# Altium PCB SART-Motor-DriverV1.0.PcbDoc
Units mm, origin at the board's own origin, x right, y up, seen from the top; angles counter-clockwise.
Board outline 70 x 50 mm, 4 copper layers (Top Layer, Layer 1, Layer 2, Bottom Layer), stack 1.566 mm thick; 77 components, 66 nets, 281 pads, 65 vias.
Unrouted connection lines stored in the file: 77.
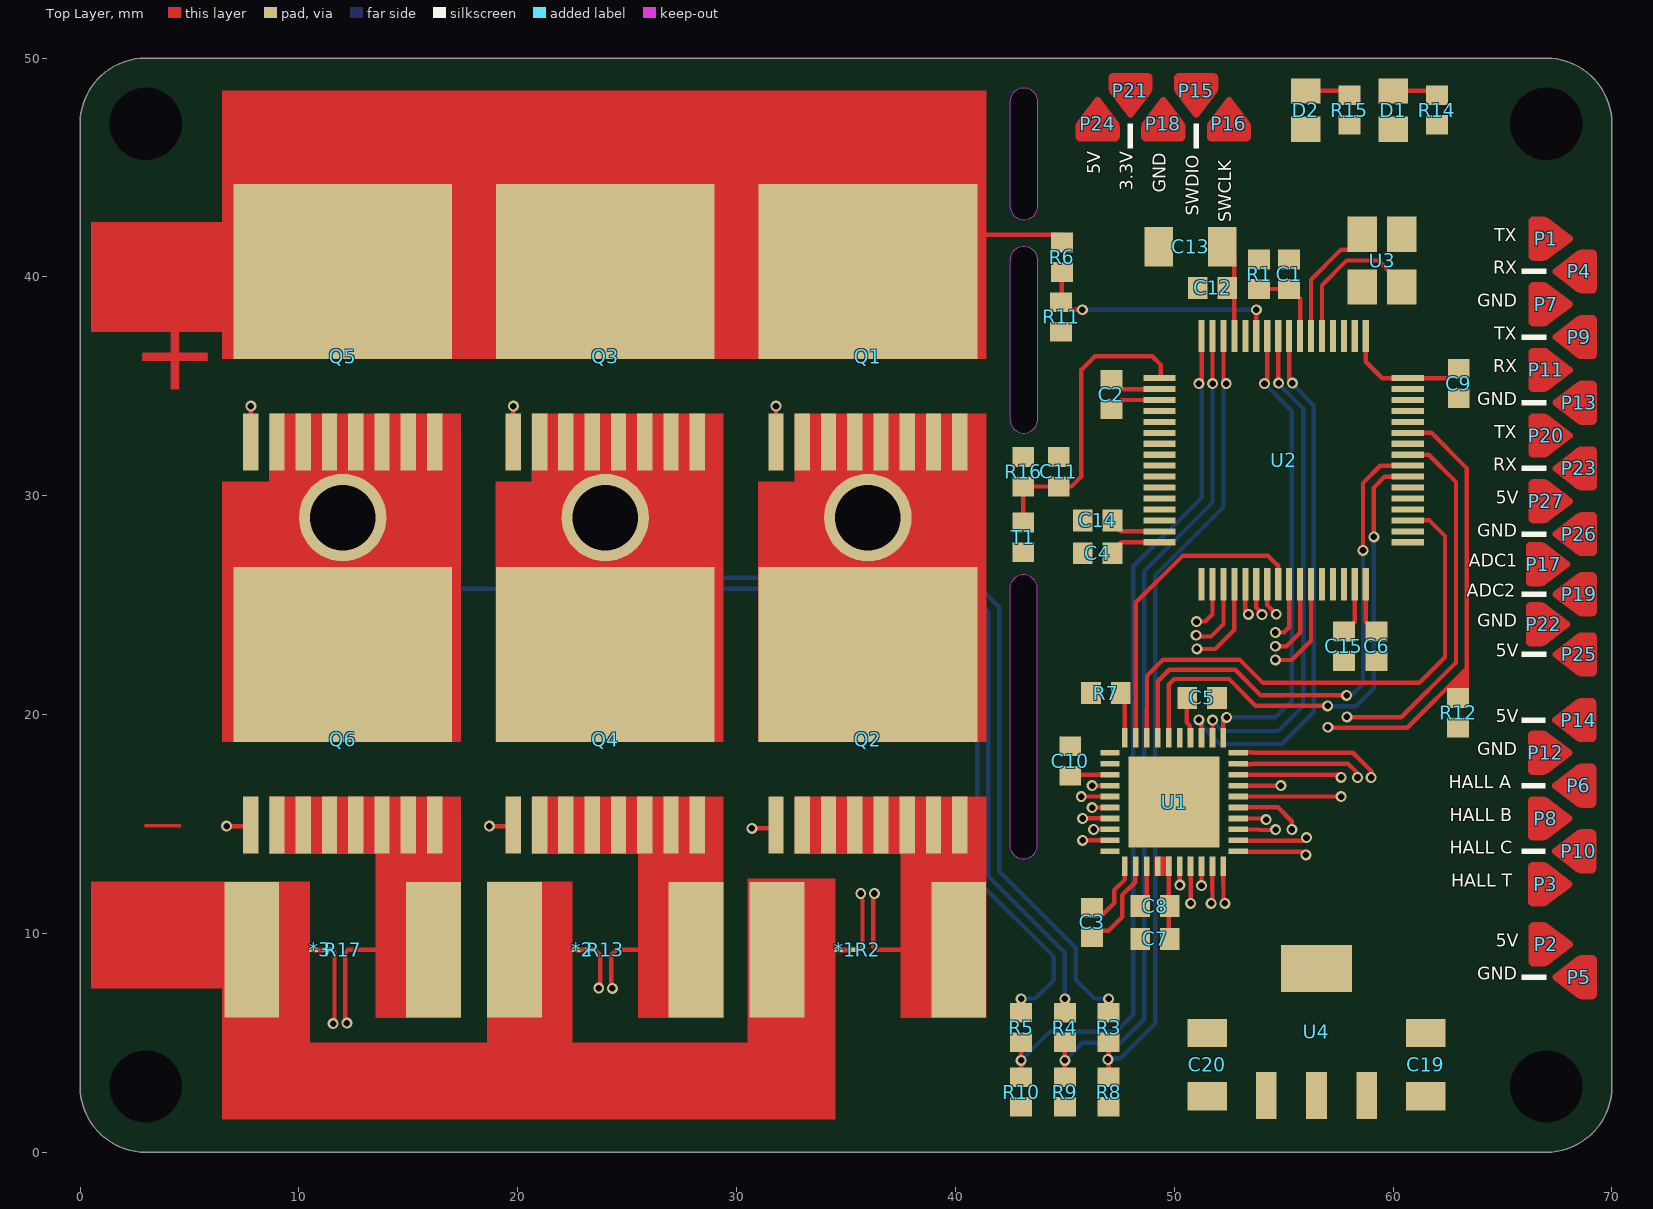
[diagram p0: Top Layer view]
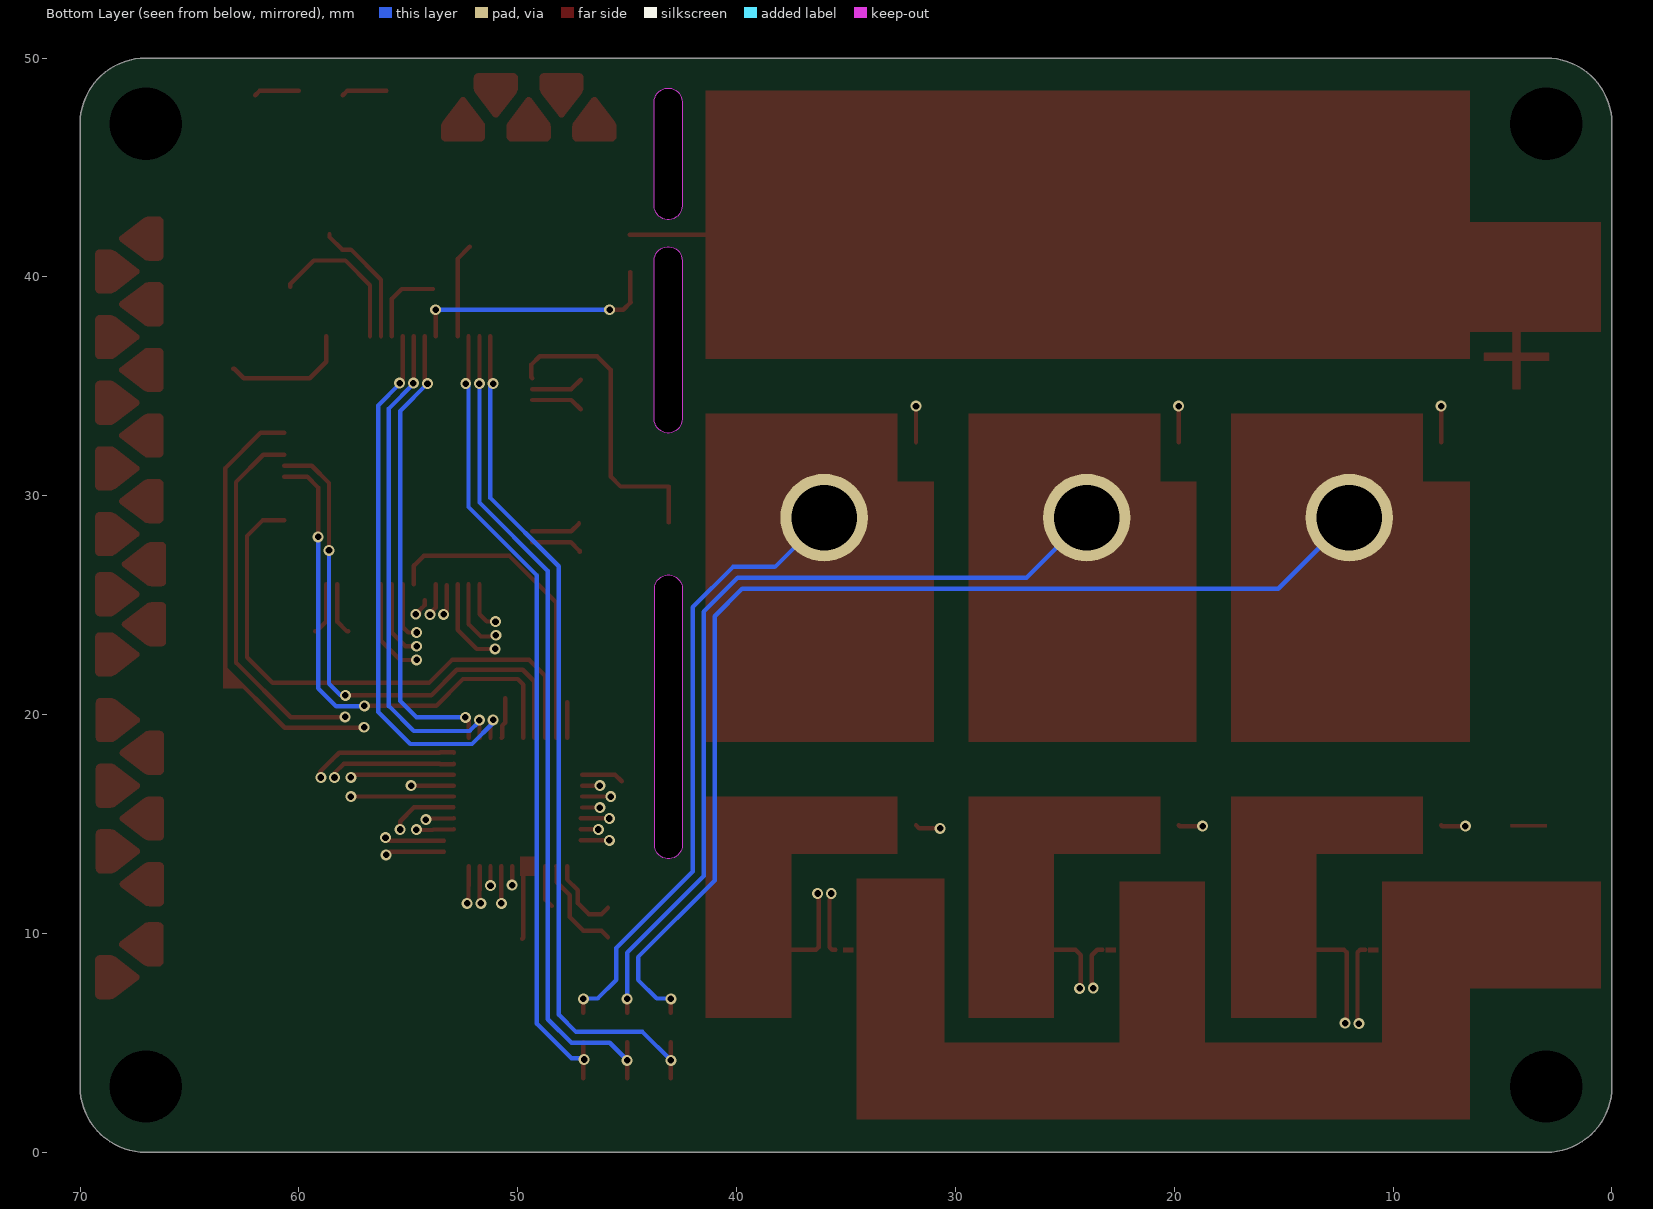
[diagram p1: Bottom Layer view, seen from below]
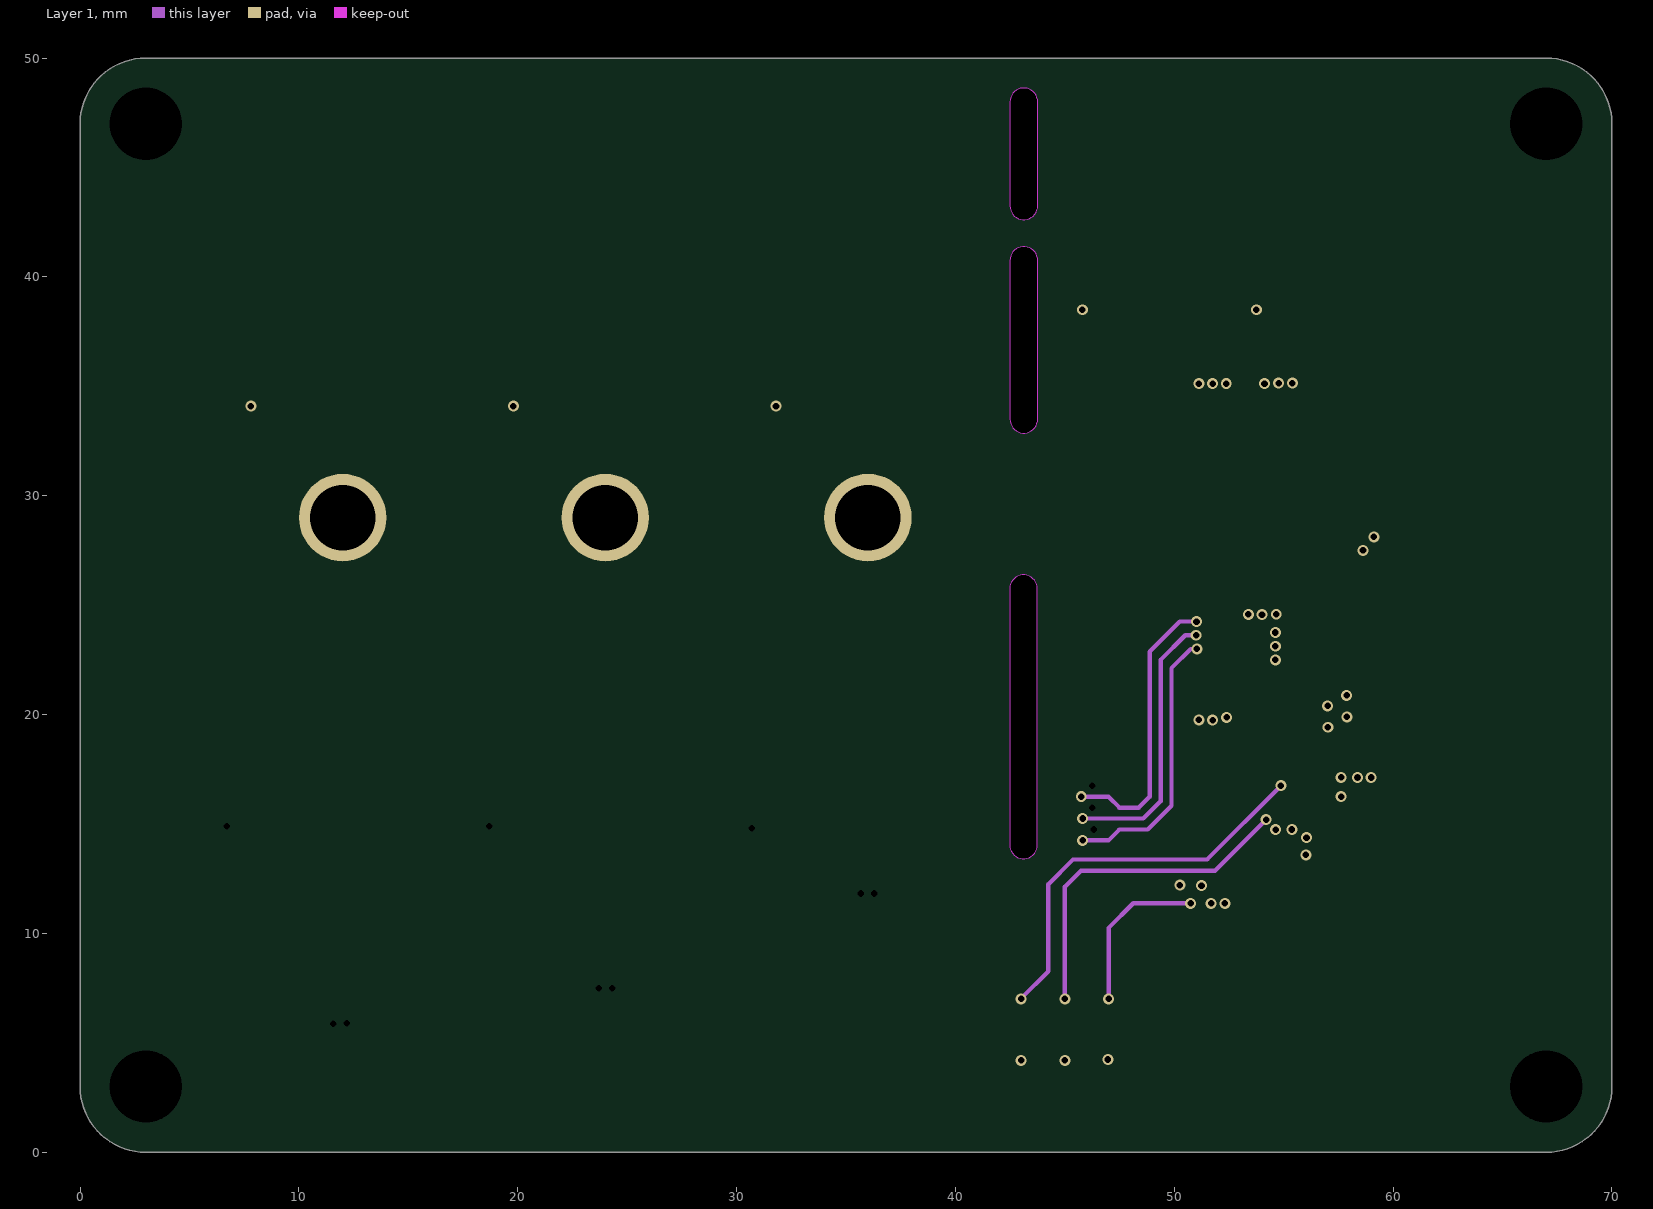
[diagram p2: Layer 1]
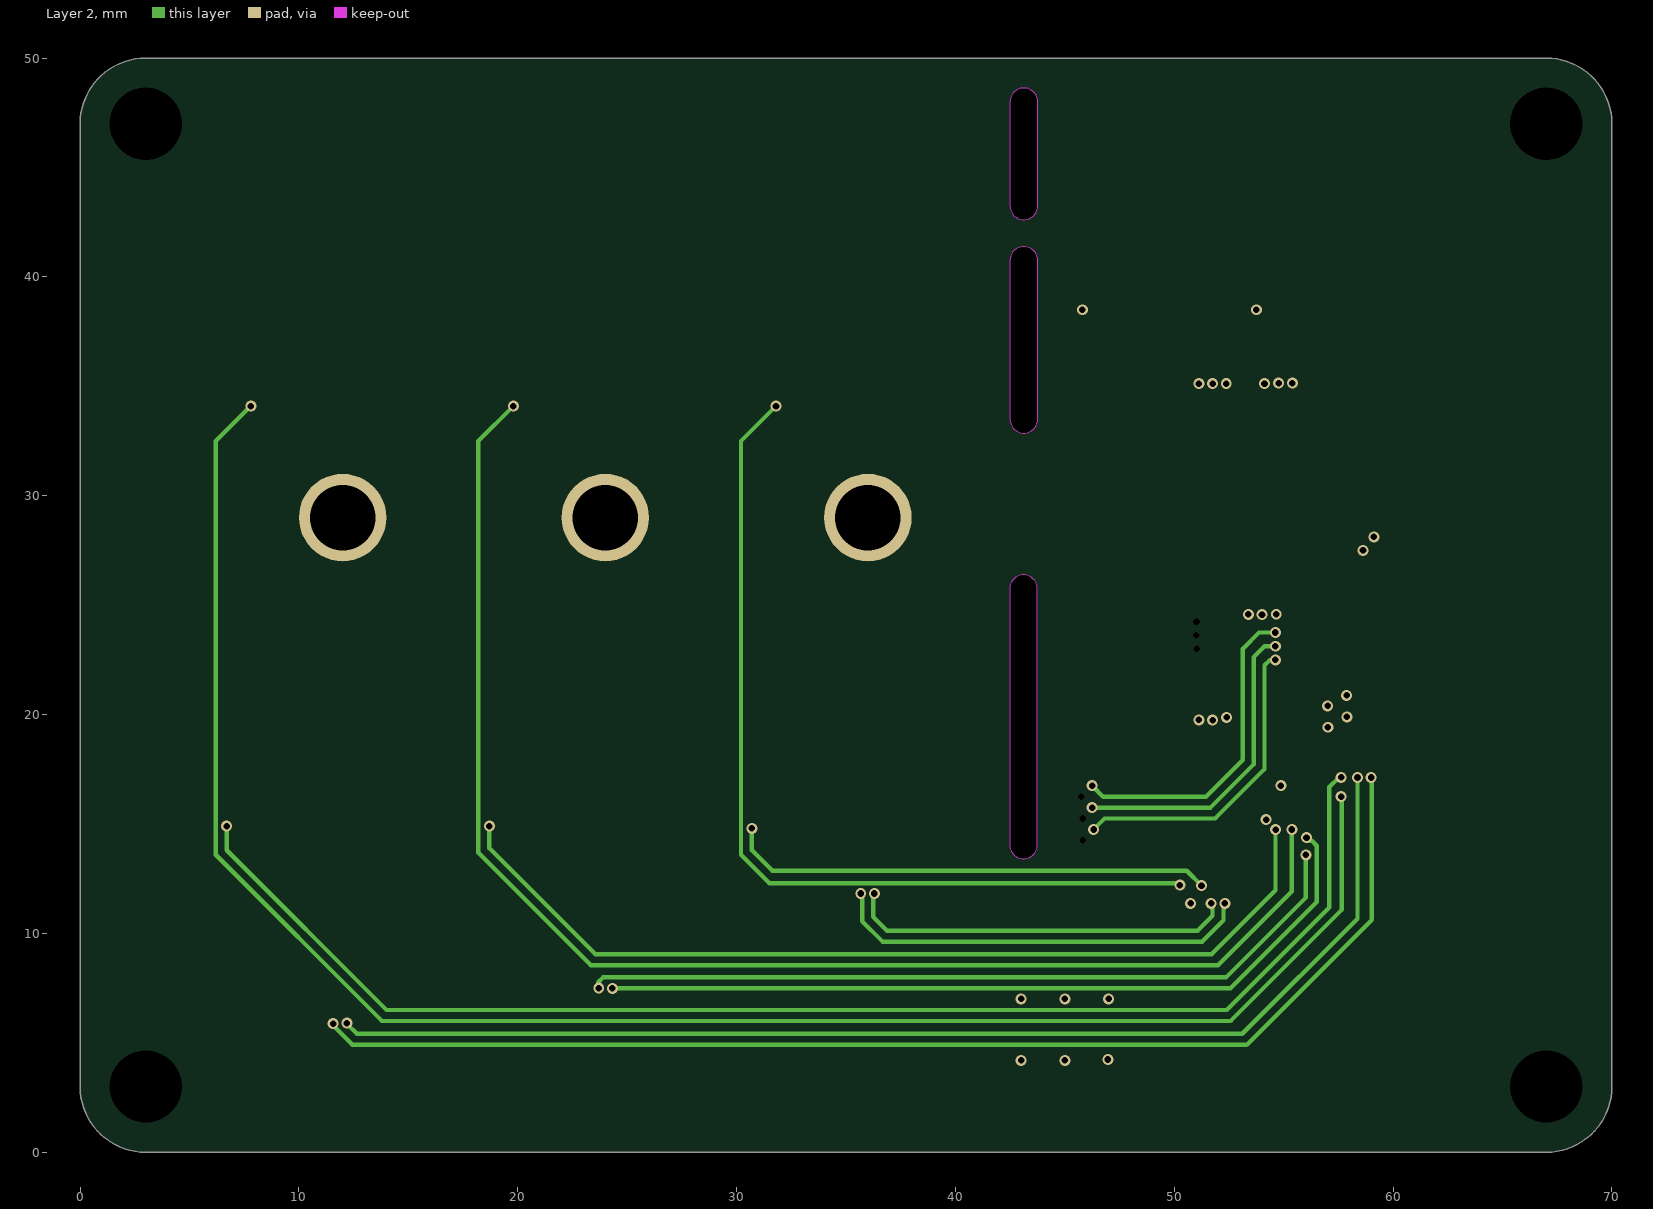
[diagram p3: Layer 2]
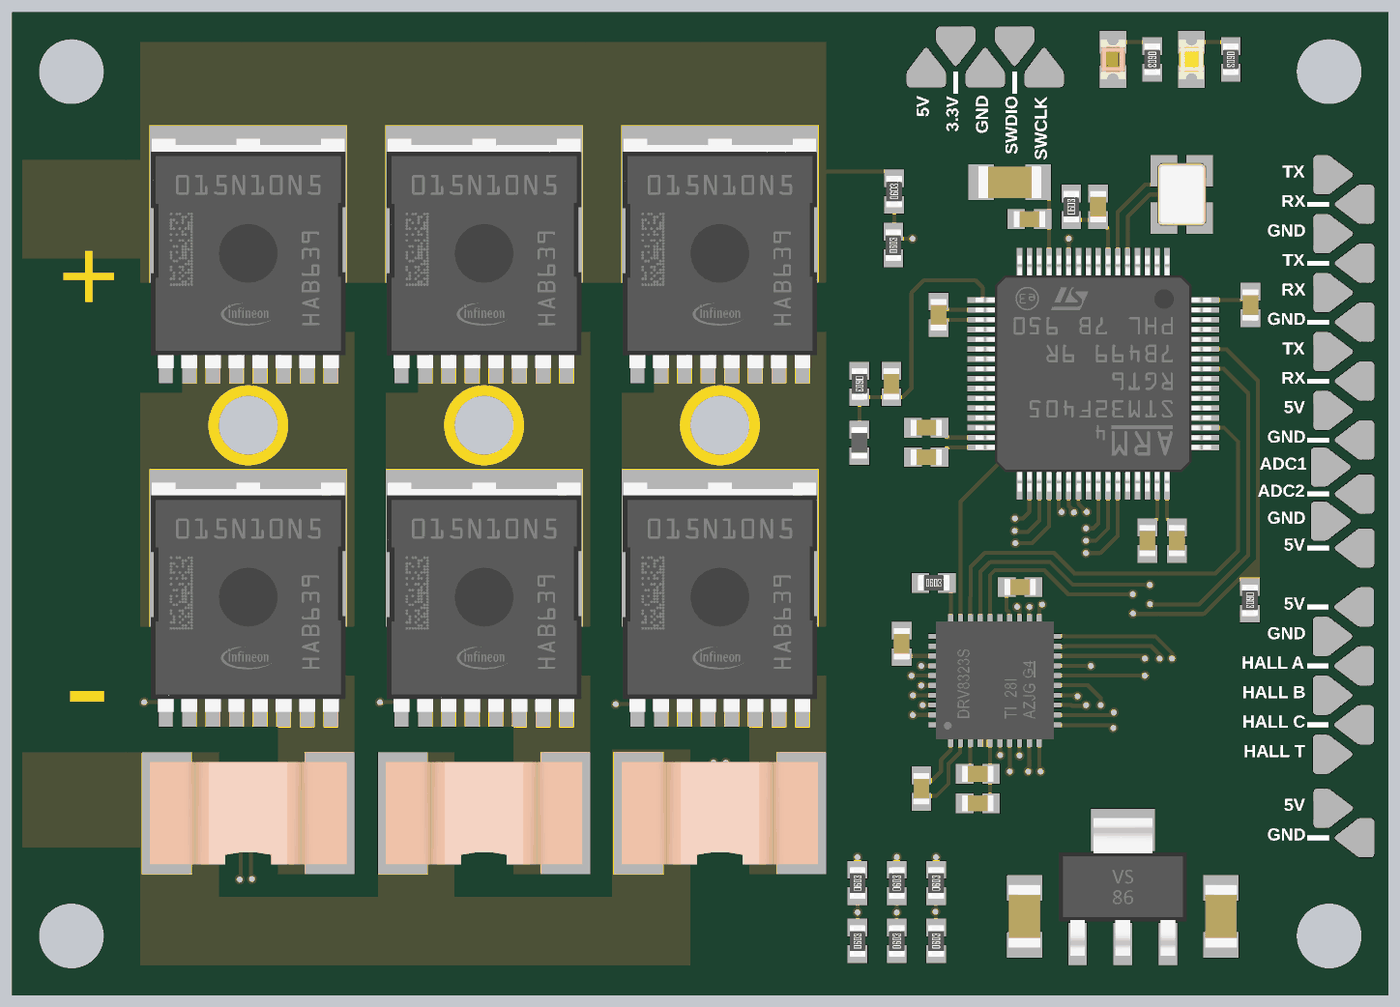
[diagram p4: 3D render of the assembled board from above, using the file's embedded part models]

## Layer stack, top to bottom
Top Solder: solder mask 0.0305, Solder Resist, Dk 3.5
Top Layer: signal copper 0.0351
Dielectric 2: prepreg 0.2029, PP-006, Dk 4.1
Layer 1: signal copper 0.03
Dielectric 1: dielectric 1.03, FR-4, Dk 4.8
Layer 2: signal copper 0.03
Dielectric 3: prepreg 0.2029, PP-006, Dk 4.1
Bottom Layer: signal copper 0.0351
Bottom Solder: solder mask 0.0305, Solder Resist, Dk 3.5

## Board outline
3,0 67,0 ccw(c67,3) 70,3 70,47 ccw(c67,47) 67,50 3,50 ccw(c3,47) 0,47 0,3 ccw(c3,3)
cut-out: 42.479,14.05 ccw(c43.115,14.05) 43.75,14.05 43.75,25.75 ccw(c43.115,25.75) 42.479,25.75
cut-out: 42.49,43.25 ccw(c43.125,43.25) 43.76,43.25 43.76,48 ccw(c43.125,48) 42.49,48
cut-out: 42.49,33.5 ccw(c43.125,33.5) 43.76,33.5 43.76,40.75 ccw(c43.125,40.75) 42.49,40.75

## Design rules (kind name [scope] priority, off if disabled: settings)
BoardOutlineClearance [All] p1: gap=0.2 ignorepadtopadclearanceinfootprint=FALSE
Clearance [All] p1: gap=0.127 ignorepadtopadclearanceinfootprint=FALSE
ComponentClearance [All] p1 off: gap=0.254 collisioncheckmode=3 verticalgap=0 showdistances=FALSE checkcomponentboundary=TRUE
DiffPairsRouting [All] p1: maxlimit=0.3 minlimit=0.3 mostfreqgap=0.3 toplayer_minwidth=0.2 toplayer_maxwidth=0.2 toplayer_prefwidth=0.2 midlayer1_minwidth=0.2 midlayer1_maxwidth=0.2 midlayer1_prefwidth=0.2 midlayer2_minwidth=0.2 midlayer2_maxwidth=0.2 midlayer2_prefwidth=0.2 bottomlayer_minwidth=0.2 bottomlayer_maxwidth=0.2 bottomlayer_prefwidth=0.2 maxuncoupledlength=12.7
PolygonConnect [All] p1: connectstyle=Relief reliefconductorwidth=0.254 reliefentries=4 polygonreliefangle="90 Angle" airgapwidth=0.254
RoutingVias [All] p1: holewidth=0.3 width=0.5 viastyle="Through Hole" minholewidth=0.3 minwidth=0.5 maxholewidth=0.711 maxwidth=1.27
ShortCircuit [InComponent('*1')or InComponent('*2') or InComponent('*3') vs InComponent('*1')or InComponent('*2') or InComponent('*3')] p1: allowed=TRUE
SilkToSilkClearance [All] p1 off: silktosilkclearance=0.254
SolderMaskExpansion [All] p1: expansion=0.035 istentingtop=FALSE
Width [All] p1: maxlimit=2 minlimit=0.127 preferedwidth=0.2
26 further rules are at their usual default settings.

## Classes and differential pairs
net class ShuntNet: SA_N SB_N SC_N
differential pair SC: +SC_P -SC_N
differential pair SB: +SB_P -SB_N
differential pair SA: +SA_P -SA_N

## Components (designator, comment, footprint, x,y, rotation, side; value= is the part's Value field where it differs from the comment)
*1 "NetTie" NETTİE 35.125,9.25 r0 top
*2 "NetTie" NETTİE 23.125,9.25 r0 top
*3 "NetTie" NETTİE 11.125,9.25 r0 top
C1 "0603, 0.1uF" "CAP 0603_1608" 55.25,40.125 r90 top
C2 "0603, 1uF" "CAP 0603_1608" 47.125,34.625 r90 top
C3 "0603, 0.047uF" "CAP 0603_1608" 46.25,10.5 r90 top
C4 "0603, 1uF" "CAP 0603_1608" 46.5,27.375 r180 top
C5 "0603, 1uF" "CAP 0603_1608" 51.275,20.764 r0 top
C6 "0603, 1uF" "CAP 0603_1608" 59.25,23.125 r270 top
C7 "0603, 0.1uF" "CAP 0603_1608" 49.125,9.75 r180 top
C8 "0603, 1uF" "CAP 0603_1608" 49.125,11.25 r180 top
C9 "0603, 1uF" "CAP 0603_1608" 63,35.125 r270 top
C10 "0603, 1uF" "CAP 0603_1608" 45.25,17.875 r90 top
C11 "0603, 0.1uF" "CAP 0603_1608" 44.724,31.1 r90 top
C12 "0603, 0.1uF" "CAP 0603_1608" 51.75,39.5 r180 top
C13 "1206, 2.2uF" "CAP 1206_3216" 50.75,41.375 r0 top
C14 "0603, 1uF" "CAP 0603_1608" 46.5,28.875 r0 top
C15 "0603, 1uF" "CAP 0603_1608" 57.75,23.125 r90 top
C19 "1206, 2.2uF" "CAP 1206_3216" 61.5,4 r90 top
C20 "1206, 2.2uF" "CAP 1206_3216" 51.5,4 r90 top
D1 "0805 LED Yellow" "LED 0805_2012 YELLOW" 60,47.625 r90 top
D2 "0805 LED Red" "LED 0805_2012 RED" 56,47.625 r90 top
P1 "Pad1" PAD 67,41.75 r270 top
P2 "Pad1" PAD 67,9.5 r270 top
P3 "Pad1" PAD 66.975,12.25 r270 top
P4 "Pad0" PAD 68.5,40.25 r90 top
P5 "Pad0" PAD 68.5,8 r90 top
P6 "Pad0" PAD 68.475,16.75 r90 top
P7 "Pad1" PAD 67,38.75 r270 top
P8 "Pad1" PAD 66.975,15.25 r270 top
P9 "Pad1" PAD 68.5,37.25 r90 top
P10 "Pad0" PAD 68.475,13.75 r90 top
P11 "Pad0" PAD 67,35.75 r270 top
P12 "Pad1" PAD 66.975,18.25 r270 top
P13 "Pad1" PAD 68.5,34.25 r90 top
P14 "Pad0" PAD 68.475,19.75 r90 top
P15 "Pad1" PAD 51,48.5 r180 top
P16 "Pad0" PAD 52.5,47 r0 top
P17 "Pad0" PAD 66.875,26.875 r270 top
P18 "Pad1" PAD 49.5,47 r0 top
P19 "Pad1" PAD 68.5,25.5 r90 top
P20 "Pad1" PAD 67,32.75 r270 top
P21 "Pad0" PAD 48,48.5 r180 top
P22 "Pad0" PAD 66.875,24.125 r270 top
P23 "Pad0" PAD 68.5,31.25 r90 top
P24 "Pad1" PAD 46.5,47 r0 top
P25 "Pad1" PAD 68.5,22.75 r90 top
P26 "Pad1" PAD 68.5,28.25 r90 top
P27 "Pad1" PAD 67,29.75 r270 top
Q1 "IPT015N10N5" IPT015N10N5 36,37.75 r0 top
Q2 "IPT015N10N5" IPT015N10N5 36,20.25 r0 top
Q3 "IPT015N10N5" IPT015N10N5 24,37.75 r0 top
Q4 "IPT015N10N5" IPT015N10N5 24,20.25 r0 top
Q5 "IPT015N10N5" IPT015N10N5 12,37.75 r0 top
Q6 "IPT015N10N5" IPT015N10N5 12,20.25 r0 top
R1 "0603, 10K" "RES 0603_1608" 53.875,40.125 r90 top
R2 "WSLP3921L2000FEA" WSLP3921L2000FEA 36,9.25 r270 top locked
R3 "0603, 41K" "RES 0603_1608" 47,5.7 r90 top
R4 "0603, 41K" "RES 0603_1608" 45,5.7 r90 top
R5 "0603, 41K" "RES 0603_1608" 43,5.7 r90 top
R6 "0603, 41K" "RES 0603_1608" 44.866,40.899 r90 top
R7 "0603, 10K" "RES 0603_1608" 46.875,20.978 r0 top
R8 "0603, 2.2K" "RES 0603_1608" 47,2.75 r90 top
R9 "0603, 2.2K" "RES 0603_1608" 45,2.75 r90 top
R10 "0603, 2.2K" "RES 0603_1608" 43,2.75 r90 top
R11 "0603, 2.2K" "RES 0603_1608" 44.828,38.174 r90 top
R12 "0603, 10K" "RES 0603_1608" 62.974,20.086 r270 top
R13 "WSLP3921L2000FEA" WSLP3921L2000FEA 24,9.25 r270 top
R14 "0603, 2.2K" "RES 0603_1608" 62,47.625 r270 top
R15 "0603, 2.2K" "RES 0603_1608" 58,47.625 r270 top
R16 "0603, 10K" "RES 0603_1608" 43.099,31.1 r270 top
R17 "WSLP3921L2000FEA" WSLP3921L2000FEA 12,9.25 r270 top
T1 "0603, 10K" "RES 0603_1608" 43.099,28.1 r270 top
U1 "DRV8323SRTAT" DRV8323SRTAT 49.995,16.005 r90 top
U2 "STM32F405RGT6" STM32F405RGT6 55,31.625 r270 top
U3 "FL0800011Q" FL0800011Q 59.5,40.75 r270 top
U4 "TLV1117-33IDCYR" TLV1117-33IDCYR 56.5,5.5 r90 top

## Footprints (in the part's own frame and the unit in brackets; to place one, negate y for a bottom-side part, rotate by r counter-clockwise, add the part's x,y. Pads: shape width x height; smd on the part's side, far side on the other; paste and mask are expansions set on the pad)
"CAP 0603_1608" [mm] "Chip Capacitor, 2-Leads, Body 1.60x0.80mm, IPC Medium Density"
  rect 0.9x1 smd: 1(-0.675,0) 2(0.675,0)
  body extent -0.8,-0.41 0.8,0.41, height 0.82
"CAP 1206_3216" [mm] "Chip Capacitor, 2-Leads, Body 3.25x1.60mm, IPC Medium Density"
  rect 1.3x1.8 smd: 1(-1.45,0) 2(1.45,0)
  body extent -1.6,-0.81 1.6,0.81, height 1.62
DRV8323SRTAT [mm]
  rect 0.88x0.26 smd: 1(-2.935,2.25) 2(-2.935,1.75) 3(-2.935,1.25) 4(-2.935,0.75) 5(-2.935,0.25) 6(-2.935,-0.25) 7(-2.935,-0.75) 8(-2.935,-1.25) 9(-2.935,-1.75) 10(-2.935,-2.25) 21(2.935,-2.25) 22(2.935,-1.75) 23(2.935,-1.25) 24(2.935,-0.75) 25(2.935,-0.25) 26(2.935,0.25) 27(2.935,0.75) 28(2.935,1.25) 29(2.935,1.75) 30(2.935,2.25)
  rect 0.26x0.88 smd: 11(-2.25,-2.935) 12(-1.75,-2.935) 13(-1.25,-2.935) 14(-0.75,-2.935) 15(-0.25,-2.935) 16(0.25,-2.935) 17(0.75,-2.935) 18(1.25,-2.935) 19(1.75,-2.935) 20(2.25,-2.935) 31(2.25,2.935) 32(1.75,2.935) 33(1.25,2.935) 34(0.75,2.935) 35(0.25,2.935) 36(-0.25,2.935) 37(-0.75,2.935) 38(-1.25,2.935) 39(-1.75,2.935) 40(-2.25,2.935)
  rect 4.15x4.15 smd: 41(0,0)
  body extent -3,-3 3,3, height 0.81
FL0800011Q [mm]
  rect 1.6x1.35 smd: 1(-1.2,-0.9) 3(1.2,0.9) 4(-1.2,0.9) 4(1.2,-0.9)
  body extent -1.6,-1.25 1.6,1.25, height 0.6
IPT015N10N5 [mm]
  rect 0.7x2.6 smd: G(-4.2,-5.3) S1(-3,-5.3) S1(-1.8,-5.3) S1(-0.6,-5.3) S1(0.6,-5.3) S1(1.8,-5.3) S1(3,-5.3) S1(4.2,-5.3)
  rect 10x8 smd: TAP(0,2.5)
  body extent -4.95,-5.84 4.95,5.84, height 2.41
"LED 0805_2012 RED" [mm] "Chip Diode, 2-Leads, Body 2.00x1.25mm, IPC Medium Density"
  rect 1.15x1.35 smd: 1(-0.875,0) 2(0.875,0)
  body extent -1,-0.63 1,0.63, height 0.91
"LED 0805_2012 YELLOW" [mm] "Chip Diode, 2-Leads, Body 2.00x1.25mm, IPC Medium Density"
  rect 1.15x1.35 smd: 1(-0.875,0) 2(0.875,0)
  body extent -1,-0.63 1,0.63, height 0.91
NETTİE [mm]
  rect 0.4x0.2 smd mask+0.102: 0(-0.454,0) 1(0.154,0)
  Top Layer region: 0.003,0.1 0.003,-0.1 -0.454,-0.1 -0.454,0.1
PAD [mil]
  round 1 smd: 1(0,0)
  Top Layer region: -39.37,-23.78 -39.37,-4.87 -38.61,-0.26 -36.4,3.86 -36.4,3.86 -4.29,45.6 -2.39,47.16 0,47.71 2.39,47.16 4.29,45.6 4.29,45.6 36.32,3.97 38.59,-0.27 39.37,-5.01 39.37,-5.01 39.37,-23.64 38.77,-26.65 37.07,-29.2 34.52,-30.9 31.52,-31.5 31.52,-31.5 -31.66,-31.5 -34.61,-30.91 -37.11,-29.24 -38.78,-26.73 -39.37,-23.78
"RES 0603_1608" [mm] "Chip Resistor, 2-Leads, Body 1.60x0.80mm, IPC Medium Density"
  rect 0.9x1 smd: 1(-0.675,0) 2(0.675,0)
  body extent -0.8,-0.4 0.8,0.4, height 0.45
STM32F405RGT6 [mm]
  rect 1.47x0.28 smd: 1(-5.67,3.75) 2(-5.67,3.25) 3(-5.67,2.75) 4(-5.67,2.25) 5(-5.67,1.75) 6(-5.67,1.25) 7(-5.67,0.75) 8(-5.67,0.25) 9(-5.67,-0.25) 10(-5.67,-0.75) 11(-5.67,-1.25) 12(-5.67,-1.75) 13(-5.67,-2.25) 14(-5.67,-2.75) 15(-5.67,-3.25) 16(-5.67,-3.75) 33(5.67,-3.75) 34(5.67,-3.25) 35(5.67,-2.75) 36(5.67,-2.25) 37(5.67,-1.75) 38(5.67,-1.25) 39(5.67,-0.75) 40(5.67,-0.25) 41(5.67,0.25) 42(5.67,0.75) 43(5.67,1.25) 44(5.67,1.75) 45(5.67,2.25) 46(5.67,2.75) 47(5.67,3.25) 48(5.67,3.75)
  rect 0.28x1.47 smd: 17(-3.75,-5.67) 18(-3.25,-5.67) 19(-2.75,-5.67) 20(-2.25,-5.67) 21(-1.75,-5.67) 22(-1.25,-5.67) 23(-0.75,-5.67) 24(-0.25,-5.67) 25(0.25,-5.67) 26(0.75,-5.67) 27(1.25,-5.67) 28(1.75,-5.67) 29(2.25,-5.67) 30(2.75,-5.67) 31(3.25,-5.67) 32(3.75,-5.67) 49(3.75,5.67) 50(3.25,5.67) 51(2.75,5.67) 52(2.25,5.67) 53(1.75,5.67) 54(1.25,5.67) 55(0.75,5.67) 56(0.25,5.67) 57(-0.25,5.67) 58(-0.75,5.67) 59(-1.25,5.67) 60(-1.75,5.67) 61(-2.25,5.67) 62(-2.75,5.67) 63(-3.25,5.67) 64(-3.75,5.67)
  body extent -6,-6 6,6, height 1.61
TLV1117-33IDCYR [mm]
  rect 2.15x0.95 smd: 1(-2.9,2.3) 2(-2.9,0) 3(-2.9,-2.3)
  rect 2.15x3.25 smd: ""(2.9,0)
  body extent -3.5,-3.25 3.5,3.25, height 1.81
WSLP3921L2000FEA [mm]
  rect 6.2x2.5 smd: 1(0,-4.15) 2(0,4.15)
  body extent -2.6,-5 2.6,5, height 1.19

## Part data
C1 C3 C7 C11 C12: library part "0603 Kapasitör", Voltage Rating=100V
C2 C4 C5 C6 C8 C9 C10 C14 C15: library part "0603 Kapasitör"
C13 C19 C20: library part "1206 Kapasitör", Voltage Rating=100V
R1 R3 R4 R5 R6 R7 R8 R9 R10 R11 R12 R14 R15 R16 T1: library part "0603 Direnç"

## Free pads (board coordinates)
  round 0 hole 3.3 unplated mask+1.25: 53(3,3) 53(3,47) 53(67,3) 53(67,47)
  round 4 hole 3: 54(12,29) 54(24,29) 54(36,29)

## Via types
v1: diameter 0.5, hole 0.3, Top Layer to Bottom Layer, tented both sides, 44 vias
v2: diameter 0.5/0/0.5/0.5 (per signal layer), hole 0.3, Top Layer to Bottom Layer, tented both sides, 12 vias
v3: diameter 0.5/0.5/0/0.5 (per signal layer), hole 0.3, Top Layer to Bottom Layer, tented both sides, 6 vias
v4: diameter 0.5/0.5/0.5/0.5 (per signal layer), hole 0.3, Top Layer to Bottom Layer, tented both sides, 3 vias

## Nets (pads, with @x,y where several pads share a name; then routed paths per layer and width w, separated by ;. In a path a pad name is that pad's centre, name@x,y a point inside that pad or via, vN(x,y) a via of type N, cw(c..) or ccw(c..) an arc to the next point about the centre after c; other vN are vias at no path point)
3.3V: C2.1 C4.1 C5.1 C6.1 C9.1 C12.1 C13.2 C20.2 P21.1 R1.2 R12.2 T1.2 U1.24 U2.1 U2.13 U2.19 U2.32 U2.48 U2.64 U4.2 | length 19.2
  Top Layer w0.2: C2.1 47.55,34.375 U2.19 ; C4.1@47.175,27.429 47.175,27.479 47.571,27.875 U2.32 ; C5.1@50.578,20.747 50.578,19.622 50.715,19.484 50.715,18.97 U1.24 ; C13.2 52.75,40.825 52.75,39.252 U2.13 ; U2.48 58.75,24.25 59.2,23.8 C6.1 ; U2.1 58.75,36.125 59.5,35.375 U2.64 62.525,35.375 62.95,35.8 C9.1
5V: C19.2 P2.1 P14.1 P24.1 P25.1 P27.1 U4.3
A: pad.54@36,29 Q1.S1 Q2.TAP R3.2 U1.7 | length 37.8
  Top Layer w0.2: R3.2 v1(47,7.012) ; U1.7 50.747,13.068 50.747,11.378 v1(50.75,11.375)
  Layer 1 w0.2: v1(47,7.012) 47,10.25 48.125,11.375 v1(50.75,11.375)
  Bottom Layer w0.2: pad.54@36,29 38.25,26.75 40.162,26.75 42,24.912 42,12.832 45.5,9.332 45.5,7.875 46.352,7.023 46.989,7.023 v1(47,7.012)
ADC1: P17.1 U2.21
ADC2: P19.1 U2.22
B: pad.54@24,29 Q3.S1 Q4.TAP R4.2 U1.14 | length 55.9
  Top Layer w0.2: R4.2 v1(45,7.012) ; U1.14 52.931,15.254 54.146,15.254 v1(54.2,15.2)
  Layer 1 w0.2: v1(45,7.012) 45,12.125 45.74,12.865 51.865,12.865 v1(54.2,15.2)
  Bottom Layer w0.2: pad.54@24,29 26.75,26.25 39.955,26.25 41.5,24.705 41.5,12.625 45,9.125 v1(45,7.012)
C: pad.54@12,29 Q5.S1 Q6.TAP R5.2 U1.17 | length 71.6
  Top Layer w0.2: R5.2 v1(43,7.012) ; U1.17 52.932,16.753 54.872,16.753 v1(54.875,16.75)
  Layer 1 w0.2: v1(43,7.012) 43,7.023 44.25,8.273 44.25,12.25 45.375,13.375 51.5,13.375 v1(54.875,16.75)
  Bottom Layer w0.2: pad.54@12,29 15.25,25.75 39.748,25.75 41,24.498 41,12.418 44.5,8.918 44.5,8.5 44.5,7.875 43.648,7.023 43.011,7.023 v1(43,7.012)
CAN_RX: P11.1 U2.61
CAN_TX: P9.1 U2.62
COM_RX: P23.1 U2.52
COM_TX: P20.1
CURR_A: U1.23 U2.8 | length 25
  Top Layer w0.2: v4(51.125,19.762) 51.235,19.762 51.245,19.751 U1.23 ; U2.8 55.25,35.25 55.375,35.125 55.377,35.125 v1(55.401,35.149)
  Bottom Layer w0.2: v4(51.125,19.762) 51.123,19.76 51.123,19.627 52.092,18.659 54.916,18.659 56.375,20.118 56.375,34.127 55.377,35.125 v1(55.401,35.149)
CURR_B: U1.22 U2.9 | length 23.1
  Top Layer w0.2: U1.22 51.749,18.944 51.749,19.747 v4(51.752,19.75) ; U2.9 54.75,35.149 v1(54.774,35.149)
  Bottom Layer w0.2: v4(51.752,19.75) 51.752,19.7 52.202,19.25 54.75,19.25 55.887,20.387 55.887,33.988 54.75,35.125 v1(54.774,35.149)
CURR_C: U1.21 U2.10 | length 21.5
  Top Layer w0.2: U1.21 52.245,19.721 v4(52.397,19.873) ; v1(54.123,35.125) 54.125,35.125 54.25,35.25 U2.10
  Bottom Layer w0.2: v4(52.397,19.873) 54.63,19.873 55.375,20.618 55.375,33.873 v1(54.123,35.125)
DRV_CS: U1.29 U2.40 | length 14.6
  Top Layer w0.2: U1.29 48.245,20.224 48.245,20.608 48.252,20.615 48.252,20.885 48.245,20.892 48.245,25.12 50.375,27.25 54.297,27.25 54.617,26.93 54.75,26.797 U2.40
DRV_EN: R7.2 U1.30 U2.57 | length 18.6
  Top Layer w0.2: U1.30 R7.2@47.745,20.57 ; v1@57.885,19.875 60.375,19.875 62.875,22.375 62.875,30.625 61.625,31.875 U2.57
  other v1: 57.885,19.898
DRV_FAULT: R12.1 U1.25 U2.59 | length 20
  Top Layer w0.2: v1@57.02,19.398 60.648,19.398 63.375,22.125 63.375,31.25 61.75,32.875 U2.59
  other v1: 57.02,19.421
DRV_MISO: U1.26 U2.55 | length 23.7
  Top Layer w0.2: U1.26 49.745,21.37 50,21.625 52.5,21.625 53.727,20.398 v1(57.01,20.398) ; v1(59.125,28.125) 59.125,30.375 59.625,30.875 U2.55
  Bottom Layer w0.2: v1(57.01,20.398) 57.033,20.375 58.293,20.375 59.125,21.207 v1(59.125,28.125)
DRV_MOSI: U1.27 U2.56 | length 24.4
  Top Layer w0.2: U1.27 49.245,21.523 49.77,22.048 52.785,22.048 53.957,20.875 v1(57.875,20.875) ; v1(58.625,27.5) 58.625,30.582 59.418,31.375 U2.56
  Bottom Layer w0.2: v1(57.875,20.875) 58.091,20.875 58.625,21.409 v1(58.625,27.5)
DRV_SCK: U1.28 U2.51 | length 25.2
  Top Layer w0.2: U1.28 48.745,20.262 48.754,20.271 48.754,21.777 49.477,22.5 53,22.5 54.053,21.447 61.197,21.447 62.375,22.625 62.375,28.162 61.662,28.875 U2.51
GND: *1.0 *2.0 *3.0 C1.2 C2.2 C4.2 C5.2 C6.2 C7.2 C9.2 C10.2 C11.2 C12.2 C13.1 C14.1 C15.1 C19.1 C20.1 P5.1 P7.1 P12.1 P13.1 P18.1 P22.1 P26.1 R2.1 R7.1 R8.1 R9.1 R10.1 R11.1 R13.1 R14.2 R15.2 R16.1 R17.1 U1.32 U1.40 U1.41 U2.12 U2.18 U2.60 U2.63 U3.4 U4.1 | length 2.4
  Top Layer w0.2: C2.2 47.55,34.875 U2.18
HALL_A: P6.1 U2.37 | length 1.4
  Top Layer w0.2: U2.37@53.245,25.91 53.245,24.72 v1(53.385,24.581)
HALL_B: P8.1 U2.38 | length 1.6
  Top Layer w0.2: U2.38 53.75,24.89 53.862,24.778 53.862,24.701 53.862,24.589 53.884,24.567 v1(54.011,24.567)
HALL_C: P10.1 U2.39 | length 0.9
  Top Layer w0.2: U2.39@54.25,25.22 54.25,25.003 54.358,24.895 54.488,24.764 54.488,24.584 v1(54.662,24.584)
HALL_T: P3.1 U2.24
HI_A: U1.34 U2.41 | length 18.2
  Top Layer w0.2: v2(46.25,16.75) 46.255,16.755 U1.34 ; v1(54.625,23.75) 55.009,23.75 55.25,23.991 U2.41
  Layer 2 w0.2: v2(46.25,16.75) 46.75,16.25 51.451,16.25 53.125,17.924 53.125,23 53.875,23.75 v1(54.625,23.75)
HI_B: U1.36 U2.42 | length 18.7
  Top Layer w0.2: v2@46.255,15.755 U1.36 ; v1(54.625,23.123) 55.135,23.123 55.75,23.738 U2.42
  Layer 2 w0.2: v2(46.25,15.75) 51.658,15.75 53.625,17.717 53.625,22.625 54.123,23.123 v1(54.625,23.123)
HI_C: U1.38 U2.43 | length 19.7
  Top Layer w0.2: v2@46.32,14.755 U1.38 U1.38@47.125,14.755 ; v1(54.625,22.496) 55.371,22.496 56.25,23.375 U2.43
  Layer 2 w0.2: v2(46.315,14.75) 46.815,15.25 51.866,15.25 54.125,17.509 54.125,22.25 54.371,22.496 v1(54.625,22.496)
LI_A: U1.35 U2.34 | length 16.4
  Top Layer w0.2: v3(45.75,16.25) 45.755,16.255 U1.35 ; v3(51.016,24.252) 51.418,24.252 51.75,24.583 U2.34
  Layer 1 w0.2: v3(45.75,16.25) 46.995,16.25 47.495,15.75 48.375,15.75 48.875,16.25 48.875,22.875 50.252,24.252 v3(51.016,24.252)
LI_B: U1.37 U2.35 | length 17.1
  Top Layer w0.2: v3@45.82,15.255 U1.37 U1.37@47.125,15.255 ; v3(51,23.625) 51.057,23.568 51.384,23.568 51.682,23.568 52.25,24.135 U2.35
  Layer 1 w0.2: v3(45.815,15.25) 48.582,15.25 49.375,16.043 49.375,22.5 50.5,23.625 v3(51,23.625)
LI_C: U1.39 U2.36 | length 18
  Top Layer w0.2: v3@45.82,14.255 U1.39 U1.39@47.125,14.255 ; v3(51.036,22.999) 51.376,22.999 51.874,22.999 52.75,23.875 U2.36
  Layer 1 w0.2: v3(45.815,14.25) 46.995,14.25 47.495,14.75 48.789,14.75 49.875,15.836 49.875,22.125 50.749,22.999 v3(51.036,22.999)
NetC1_1: C1.1 R1.1 U2.7 | length 3.8
  Top Layer w0.2: R1.1@53.875,39.45 C1.1 55.3,39.45 55.75,39 U2.7
NetC3_1: C3.1 U1.2 | length 4.7
  Top Layer w0.2: C3.1@45.875,9.825 46.175,10.125 47,10.125 47.625,10.75 47.625,11.75 48.215,12.34 48.215,13.04 U1.2
NetC3_2: C3.2 U1.1 | length 3.6
  Top Layer w0.2: C3.2@45.875,11.175 46.175,10.875 46.75,10.875 47.25,11.375 47.25,11.973 47.745,12.468 U1.1
NetC8_2: C8.2 U1.3 | length 1.9
  Top Layer w0.2: C8.2 48.745,11.545 U1.3
NetC10_1: C10.1 U1.33 | length 1.9
  Top Layer w0.2: C10.1@45.25,16.95 45.555,17.255 U1.33
NetC11_1: C11.1 R16.2 T1.1 U2.17 | length 14
  Top Layer w0.2: T1.1 R16.2 C11.1 45.3,30.425 45.75,30.875 45.75,35.75 46.375,36.375 49,36.375 49.375,36 49.375,35.42 U2.17
NetC14_2: C14.2 U2.31 | length 2.3
  Top Layer w0.2: C14.2@47.2,28.744 47.2,28.725 47.55,28.375 U2.31
NetC15_2: C15.2 U2.47 | length 2.4
  Top Layer w0.2: C15.2 57.8,23.8 58.25,24.25 U2.47
NetD1_1: D1.1 U2.26
NetD1_2: D1.2 R14.1 | length 2.1
  Top Layer w0.2: D1.2 61.8,48.5 R14.1
NetD2_1: D2.1 U2.27
NetD2_2: D2.2 R15.1 | length 2.1
  Top Layer w0.2: D2.2 57.8,48.5 R15.1
NetQ1_G: Q1.G U1.6 | length 44.2
  Top Layer w0.2: Q1.G v1(31.8,34.1) ; U1.6 50.253,13.062 50.253,12.214 v1(50.261,12.206)
  Layer 2 w0.2: v1(31.8,34.1) 30.2,32.5 30.2,13.593 31.493,12.3 v1@50.2,12.3
NetQ2_G: Q2.G U1.8 | length 24.3
  Top Layer w0.2: v2(30.7,14.8) 30.781,14.8 31.65,14.8 Q2.G ; v1@51.246,12.186 U1.8@51.246,13.069
  Layer 2 w0.2: v2(30.7,14.8) 30.7,13.8 31.635,12.865 50.567,12.865 v1(51.246,12.185)
NetQ3_G: Q3.G U1.15 | length 69.3
  Top Layer w0.2: Q3.G v1(19.8,34.1) ; U1.15@52.935,15.76 54.74,15.76 55.375,15.125 v1(55.375,14.75)
  Layer 2 w0.2: v1(19.8,34.1) 18.2,32.5 18.2,13.693 23.34,8.553 52.014,8.553 55.375,11.914 v1(55.375,14.75)
NetQ4_G: Q4.G U1.13 | length 45.8
  Top Layer w0.2: v2(18.7,14.9) 19.75,14.9 Q4.G ; U1.13 52.935,14.75 53.867,14.75 53.894,14.723 54.609,14.723 v1(54.631,14.744)
  Layer 2 w0.2: v2(18.7,14.9) 18.7,13.9 23.547,9.053 51.707,9.053 54.625,11.971 54.625,14.739 v1(54.631,14.744)
NetQ5_G: Q5.G U1.16 | length 89.4
  Top Layer w0.2: Q5.G v1(7.8,34.1) ; U1.16 57.62,16.255 v1(57.625,16.25)
  Layer 2 w0.2: v1(7.8,34.1) 6.2,32.5 6.2,13.593 13.793,6 52.576,6 57.649,11.073 57.649,16.226 v1(57.625,16.25)
NetQ6_G: Q6.G U1.18 | length 68.5
  Top Layer w0.2: v2(6.7,14.9) 7.75,14.9 Q6.G ; U1.18 57.495,17.255 v1(57.623,17.127)
  Layer 2 w0.2: v2(6.7,14.9) 6.7,13.8 14,6.5 52.4,6.5 57.088,11.188 57.088,16.689 57.523,17.125 57.622,17.125 v1(57.623,17.127)
NetR6_1: R6.1 R11.2 U2.11 | length 11.7
  Top Layer w0.2: R6.1 44.866,38.887 R11.2 45.177,38.5 v1(45.8,38.5) ; U2.11 v1(53.75,38.5)
  Bottom Layer w0.2: v1(45.8,38.5) v1(53.75,38.5)
NetU2_5: U2.5 U3.3 | length 7
  Top Layer w0.2: U2.5 56.75,39.625 57.875,40.75 59.325,40.75 60.4,39.675 U3.3
NetU2_6: U2.6 U3.1 | length 5.9
  Top Layer w0.2: U2.6 56.25,39.875 57.625,41.25 57.9,41.25 58.025,41.25 58.6,41.825 U3.1
RX_SDA: P4.1 U2.20 U2.30
SA_N: *1.1 U1.10 | length 23.9
  Top Layer w0.2: 35.48,9.25 35.635,9.25 35.752,9.367 35.752,11.532 35.731,11.553 35.731,11.766 v2(35.674,11.823) ; U1.10 52.245,12.179 52.25,12.174 52.25,11.642 52.256,11.636 52.256,11.432 v1(52.313,11.375)
  Layer 2 w0.2: v2(35.674,11.823) 35.731,11.766 35.731,11.585 35.737,11.579 35.737,10.556 36.668,9.625 51.275,9.625 52.25,10.6 52.25,11.108 52.256,11.114 52.256,11.318 v1(52.313,11.375)
SA_P: Q2.S1 R2.2 U1.9 | length 25.9
  Top Layer w0.2: v2(36.301,11.823) 36.252,11.775 36.252,9.367 36.369,9.25 R2.2 ; v1(51.687,11.375) 51.744,11.432 51.744,11.636 51.75,11.642 51.75,11.967 51.745,11.972 U1.9
  Layer 2 w0.2: v2(36.301,11.823) 36.243,11.766 36.243,11.585 36.237,11.579 36.237,10.763 36.875,10.125 51.068,10.125 51.75,10.807 51.75,11.108 51.744,11.114 51.744,11.318 v1(51.687,11.375)
SB_N: *2.1 U1.11 | length 41
  Top Layer w0.2: *2.1 23.515,9.25 23.765,9 23.765,7.564 v2(23.701,7.5) ; 53.37,13.734 55.874,13.734 v1(56.017,13.591)
  Layer 2 w0.2: v2(23.701,7.5) 23.678,7.5 23.678,7.769 23.898,7.989 52.364,7.989 56.017,11.642 v1(56.017,13.591)
SB_P: Q4.S1 R13.2 U1.12 | length 45.4
  Top Layer w0.2: v2(24.328,7.489) 24.328,7.5 24.265,7.564 24.265,9 24.515,9.25 R13.2 ; 53.37,14.234 55.901,14.234 v1(56.044,14.377)
  Layer 2 w0.2: v2(24.328,7.489) 52.239,7.489 52.571,7.489 56.517,11.435 56.517,11.767 56.517,14.01 56.286,14.241 56.044,14.241 v1(56.044,14.377)
SC_N: *3.1 U1.20 | length 67
  Top Layer w0.2: *3.1 11.508,9.25 11.625,9.133 11.625,6.125 ; U1.20 52.93,18.285 53.536,18.285 53.566,18.255 58.162,18.255 58.475,17.942 59.023,17.394 59.023,17.125 v1(59,17.125)
  Layer 2 w0.2: v2(11.562,5.875) 11.562,5.794 11.746,5.609 12.443,4.912 53.319,4.912 59.023,10.616 59.023,16.856 59.023,17.125 v1(59,17.125)
SC_P: Q6.S1 R17.2 U1.19 | length 68
  Top Layer w0.2: v2@12.125,6.125 12.125,9.133 12.242,9.25 R17.2 ; U1.19 52.93,17.725 53.536,17.725 53.566,17.755 57.944,17.755 58.373,17.326 v1(58.373,17.125)
  Layer 2 w0.2: v2(12.188,5.9) 12.212,5.9 12.212,5.877 12.246,5.843 12.246,5.817 12.65,5.412 53.112,5.412 58.373,10.673 v1(58.373,17.125)
SWCLK: P16.1 U2.49
SWDIO: P15.1 U2.46
TX_SCL: P1.1 pad.53@67,47 U2.23 U2.29
V_A: R3.1 R8.2 U2.14 | length 37.4
  Top Layer w0.2: v1(46.963,4.237) v1@47,4.2 ; R8.2@47,3.375 v1@47,4.2 ; R3.1 v1@47,4.2 ; U2.14 52.25,35.252 v1(52.377,35.125)
  Bottom Layer w0.2: v1(46.963,4.237) 47.02,4.295 47.545,4.295 49.125,5.875 49.125,26.359 52.25,29.484 52.25,34.998 v1(52.377,35.125)
V_B: R4.1 R9.2 U2.15 | length 38.6
  Top Layer w0.2: R9.2@45,3.375 v1(45,4.2) R4.1 ; v1(51.75,35.125) U2.15
  Bottom Layer w0.2: v1(45,4.2) 45.8,5 47.543,5 48.625,6.082 48.625,26.566 51.75,29.691 v1(51.75,35.125)
V_C: R5.1 R10.2 U2.16 | length 40
  Top Layer w0.2: R10.2@43,3.375 v1(43,4.2) R5.1 ; v1(51.123,35.125) 51.25,35.252 U2.16
  Bottom Layer w0.2: v1(43,4.2) 44.3,5.5 47.336,5.5 48.125,6.289 48.125,26.773 51.25,29.898 51.25,34.998 v1(51.123,35.125)
VCC: C7.1 C8.1 Q1.TAP Q3.TAP Q5.TAP R6.2 U1.4 U1.5 | length 12.9
  Top Layer w0.2: Q1.TAP 37.675,41.925 R6.2@44.875,41.925 ; U1.5 49.745,9.805 C7.1
pads on no net: U1.31 U2.2 U2.3 U2.4 U2.25 U2.28 U2.33 U2.44 U2.45 U2.50 U2.53 U2.54 U2.58 U4.

## Other copper
Top Layer:
  region net DRV_FAULT: 62.468,21.2 63.468,22.2 63.468,21.2
  region net VCC: 6.5,42.5 0.5,42.5 0.5,37.5 6.5,37.5 6.5,36.25 41.4,36.25 41.4,48.5 6.5,48.5
  region net VCC: 49.115,12.63 49.875,12.63 49.875,13.51 49.115,13.51
  region net GND: 6.5,7.5 0.5,7.5 0.5,12.35 6.5,12.35 10.5,12.35 10.5,5 18.6,5 18.6,12.35 22.5,12.35 22.5,5 30.5,5 30.5,12.5 34.5,12.5 34.5,1.5 6.5,1.5
  region net SC_P: 8.65,16.25 8.65,13.65 13.5,13.65 13.5,6.15 17.4,6.15 17.4,16.25
  region net SB_P: 20.65,16.25 20.65,13.65 25.5,13.65 25.5,6.15 29.4,6.15 29.4,16.25
  region net SA_P: 32.65,16.25 32.65,13.65 37.5,13.65 37.5,6.15 41.4,6.15 41.4,16.25
  region net A: 41.4,33.75 41.4,18.75 31,18.75 31,30.65 32.65,30.65 32.65,33.75
  region net B: 29.4,33.75 29.4,18.75 19,18.75 19,30.65 20.65,30.65 20.65,33.75
  region net C: 17.4,33.75 17.4,18.75 6.5,18.75 6.5,30.65 8.65,30.65 8.65,33.75
  text "+" at 2.333,33.709 h6
  text "-" at 2.626,11.845 h8

## Silkscreen, mask and mechanical layers (free items; w line width, h text height)
Top Overlay:
  region: 51.125,45.875 51.125,47 50.875,47 50.875,45.875
  region: 48.125,45.875 48.125,47 47.875,47 47.875,45.875
  rectangle: 65.875,28.125 67,28.375
  rectangle: 65.875,40.125 67,40.375
  rectangle: 65.875,37.125 67,37.375
  rectangle: 65.875,7.869 67,8.119
  rectangle: 65.875,13.625 66.975,13.875
  rectangle: 65.875,16.625 66.975,16.875
  rectangle: 65.875,19.625 66.975,19.875
  rectangle: 65.875,22.625 67,22.875
  rectangle: 65.875,25.375 67,25.625
  rectangle: 65.875,31.125 67,31.375
  rectangle: 65.875,34.125 67,34.375
  text "5V" at 46.814,44.696 h1 r90
  text "3.3V" at 48.316,43.943 h1 r90
  text "GND" at 49.82,43.851 h1 r90
  text "SWDIO" at 51.32,42.788 h1 r90
  text "SWCLK" at 52.82,42.506 h1 r90
  text "TX" at 64.629,41.43 h1
  text "RX" at 64.576,39.93 h1
  text "GND" at 63.851,38.43 h1
  text "TX" at 64.629,36.93 h1
  text "RX" at 64.576,35.43 h1
  text "GND" at 63.851,33.93 h1
  text "TX" at 64.629,32.43 h1
  text "RX" at 64.576,30.93 h1
  text "5V" at 64.696,29.436 h1
  text "GND" at 63.851,27.93 h1
  text "ADC1" at 63.463,26.555 h1
  text "ADC2" at 63.362,25.18 h1
  text "GND" at 63.851,23.805 h1
  text "5V" at 64.696,22.436 h1
  text "5V" at 64.696,19.436 h1
  text "GND" at 63.851,17.93 h1
  text "HALL A" at 62.542,16.43 h1
  text "HALL B" at 62.582,14.93 h1
  text "HALL C" at 62.584,13.43 h1
  text "HALL T" at 62.655,11.93 h1
  text "5V" at 64.696,9.186 h1
  text "GND" at 63.851,7.682 h1
Top Solder:
  text "+" at 2.333,33.709 h6
  text "-" at 2.626,11.845 h8